# Altium PCB Motion_Detector_Light.PcbDoc
Units mm, origin at the board's own origin, x right, y up, seen from the top; angles counter-clockwise.
Board outline 75 x 30 mm, 4 copper layers (Top Layer, Layer 1, Layer 2, Bottom Layer), stack 1.548 mm thick; 23 components, 14 nets, 73 pads, 24 vias.
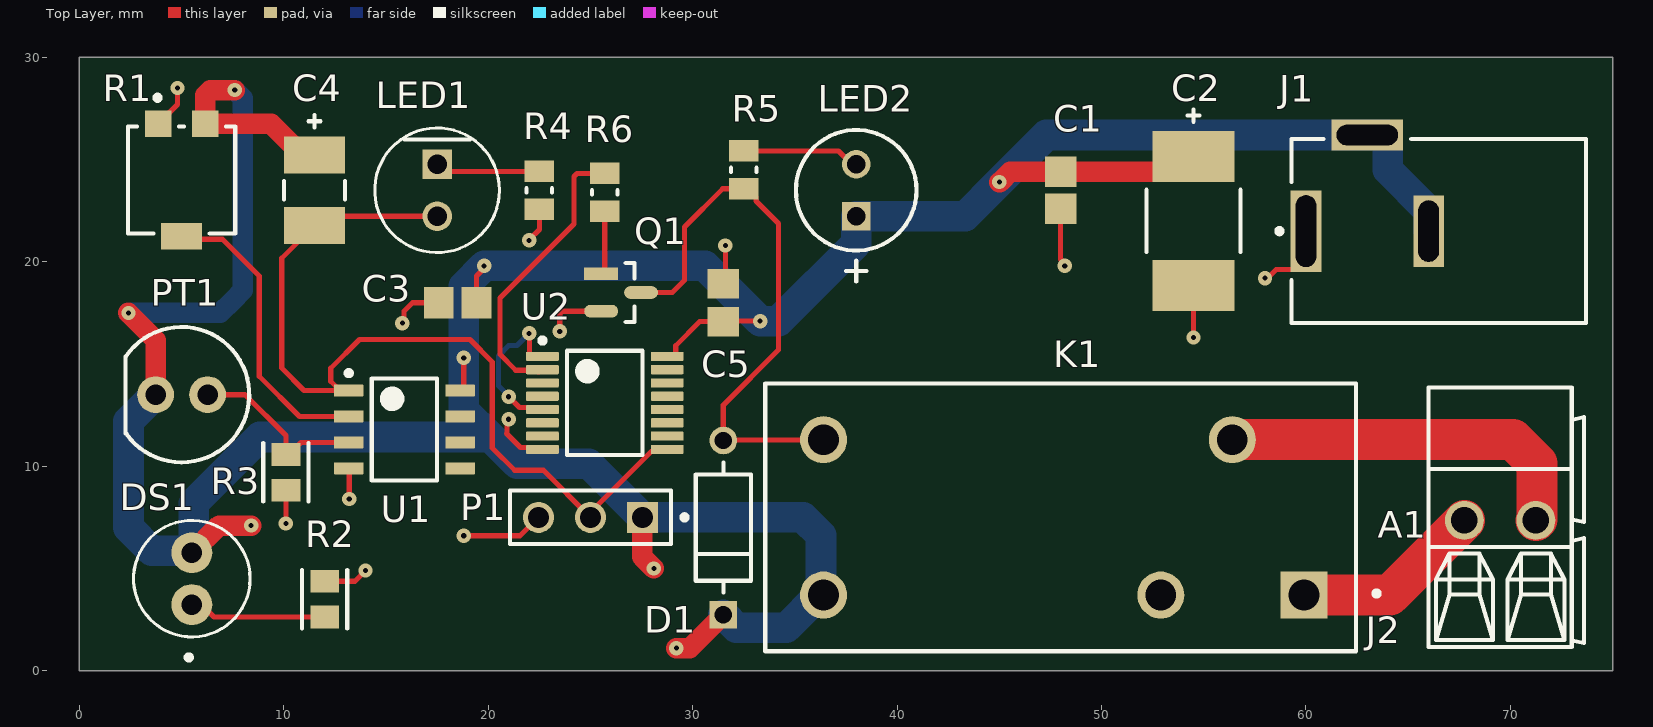
[diagram p0: Top Layer view]
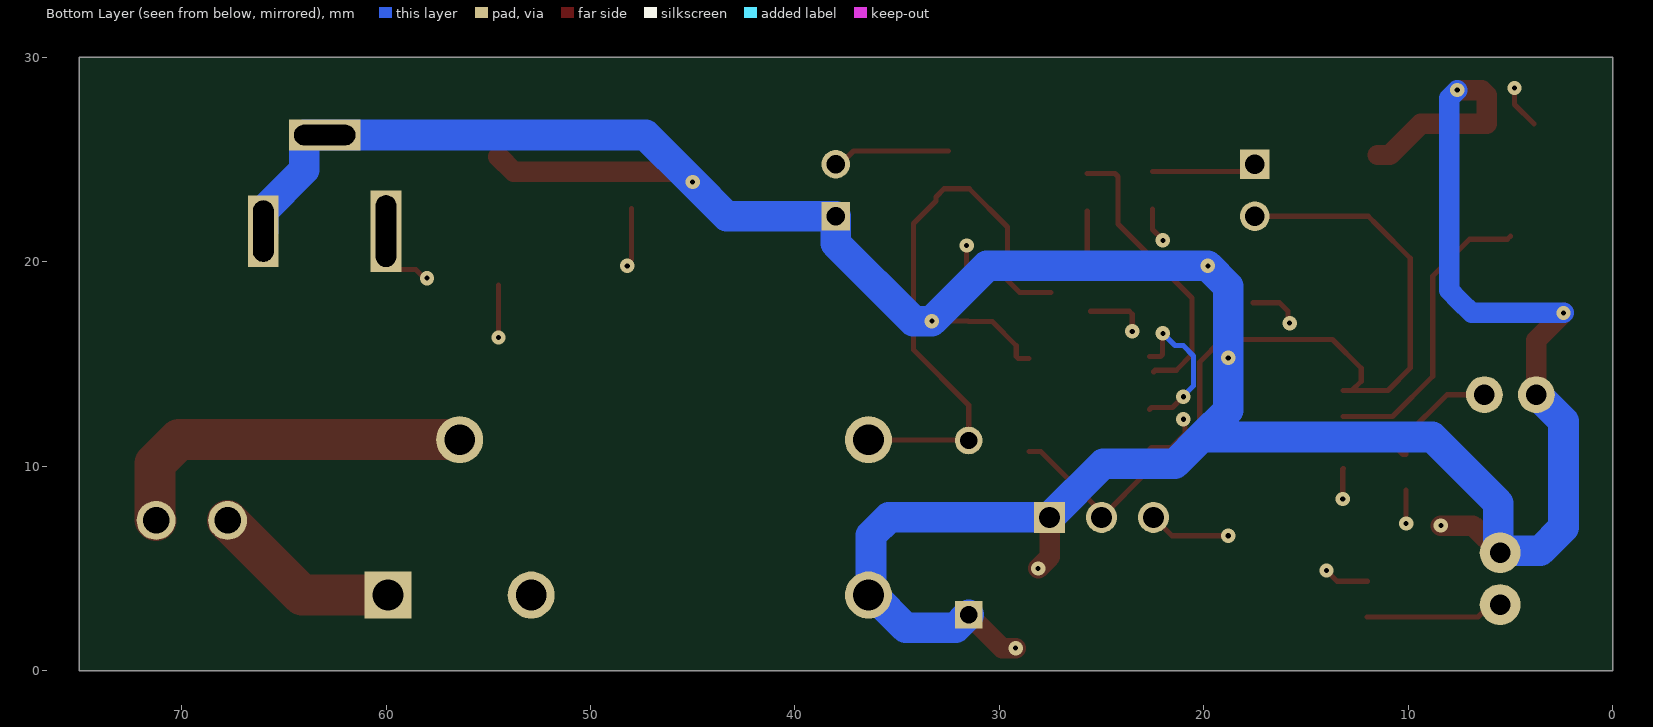
[diagram p1: Bottom Layer view, seen from below]
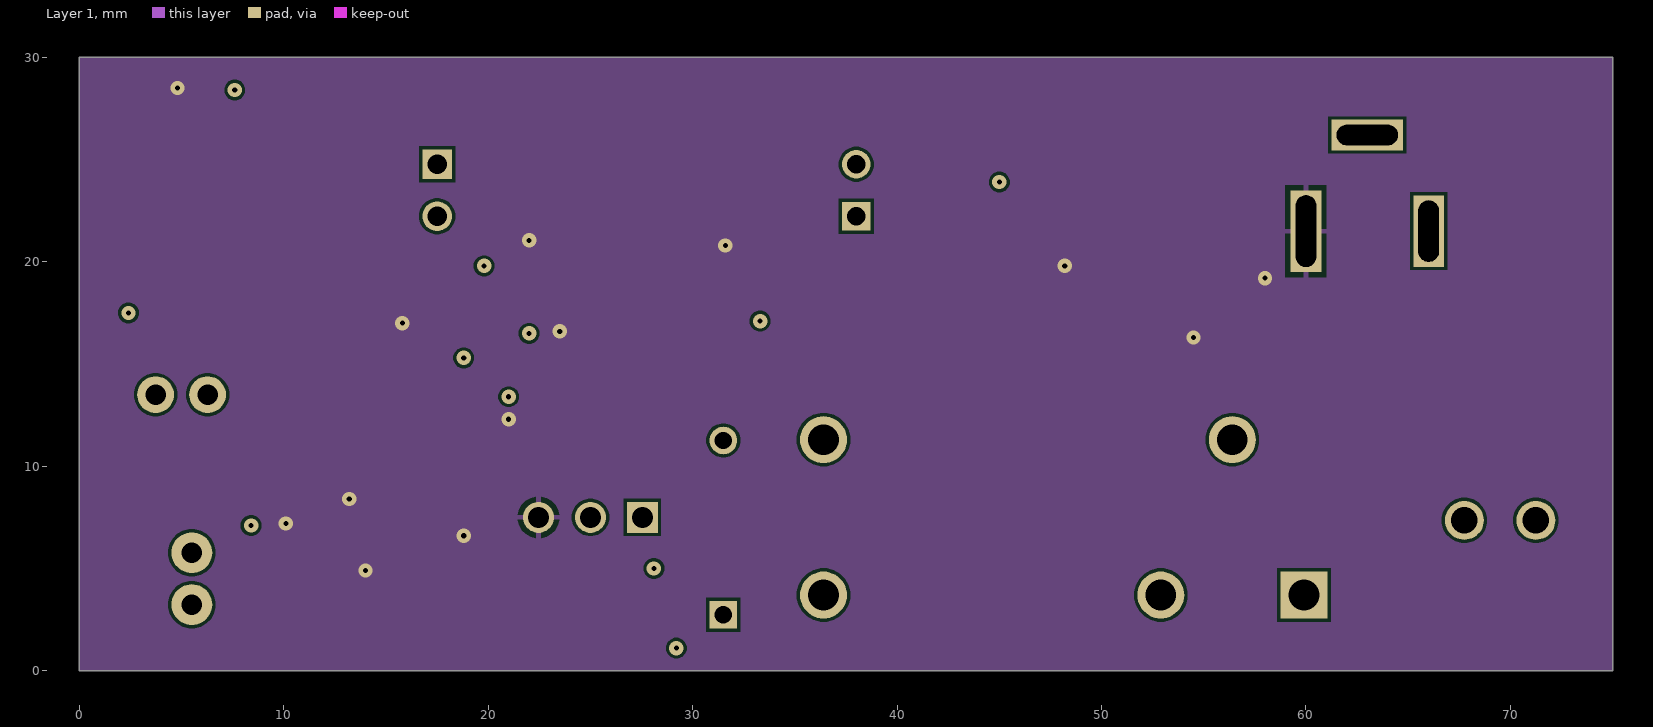
[diagram p2: Layer 1]
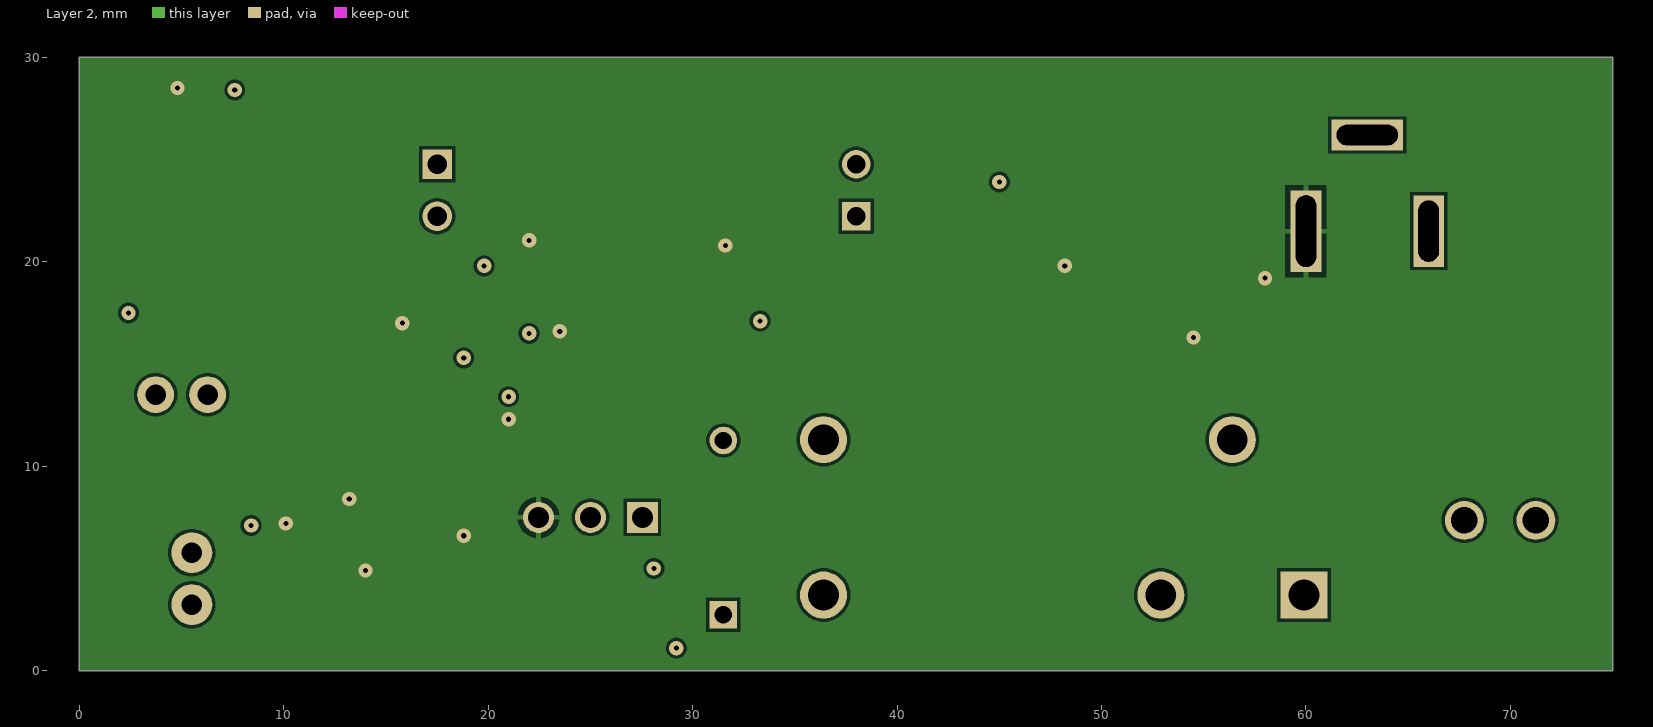
[diagram p3: Layer 2]
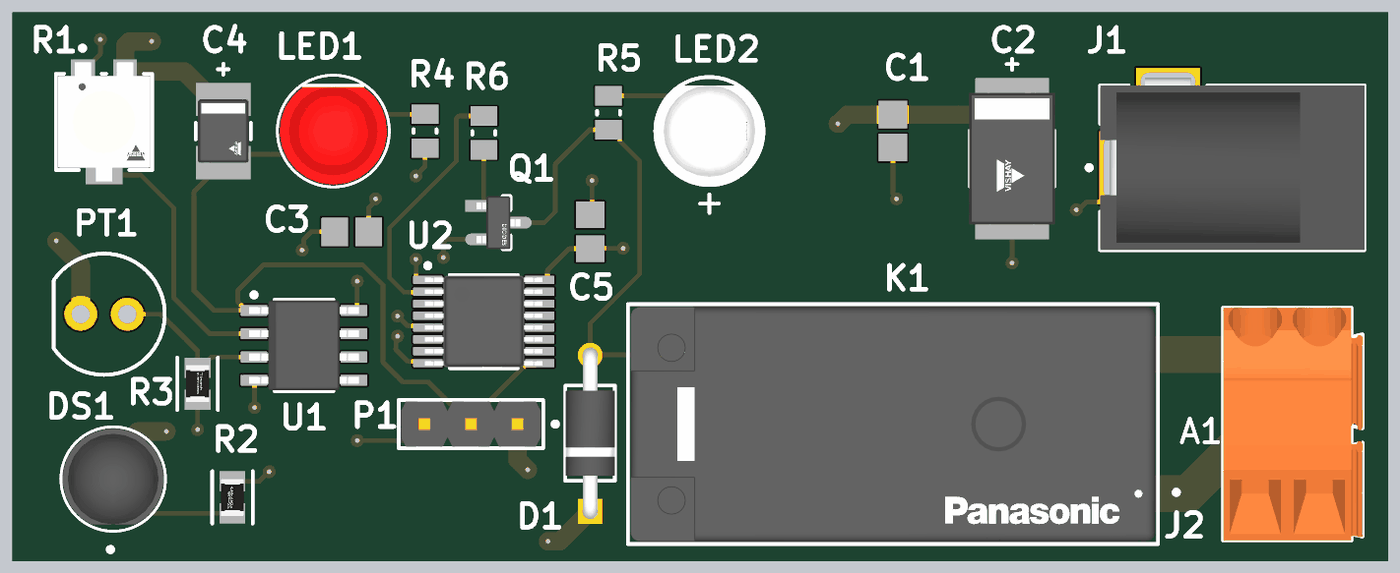
[diagram p4: 3D render of the assembled board from above, using the file's embedded part models]

## Layer stack, top to bottom
Top Solder: solder mask 0.0102, Solder Resist, Dk 3.5
Top Layer: signal copper 0.0356
Dielectric 2: prepreg 0.2083, PP-022, Dk 4.5
Layer 1: signal copper 0.035
Dielectric 1: core 0.9906, Core-042, Dk 4.6
Layer 2: signal copper 0.035
Dielectric 3: prepreg 0.2083, PP-022, Dk 4.5
Bottom Layer: signal copper 0.0356
Bottom Solder: solder mask 0.0102, Solder Resist, Dk 3.5

## Board outline
0,0 75,0 75,30 0,30

## Design rules (kind name [scope] priority, off if disabled: settings)
Clearance [All] p1: gap=0.15 ignorepadtopadclearanceinfootprint=FALSE
PolygonConnect [All] p1: thpad.connectstyle=Relief thpad.reliefconductorwidth=0.254 thpad.reliefentries=4 thpad.polygonreliefangle="90 Angle" thpad.airgapwidth=0.254 smdpad.connectstyle=Relief smdpad.reliefconductorwidth=0.254 smdpad.reliefentries=4 smdpad.polygonreliefangle="90 Angle" smdpad.airgapwidth=0.254 via.connectstyle=Direct via.reliefconductorwidth=0.254 via.reliefentries=4 via.polygonreliefangle="90 Angle" via.airgapwidth=0.254
RoutingVias [All] p1: holewidth=0.25 width=0.7 viastyle="Through Hole" minholewidth=0.25 minwidth=0.7 maxholewidth=0.25 maxwidth=0.7
SolderMaskExpansion [All] p1: expansion=0.102 istentingtop=FALSE
SupplyNets "Schematic Supply Nets_1" [InNet('GND')] p1: voltage=0.000
SupplyNets "Schematic Supply Nets" [InNet('5V')] p2: voltage=0.000
Width [All] p1: maxlimit=2 minlimit=0.15 preferedwidth=0.254
30 further rules are at their usual default settings.

## Classes and differential pairs
component class Motion_Control_Inputs: C1 C2 C3 C4 DS1 J1 LED1 P1 PT1 R1 R2 R3 R4 U1
component class Counter_Switch: C5 D1 J2 K1 LED2 Q1 R5 R6 U2

## Components (designator, comment, footprint, x,y, rotation, side; value= is the part's Value field where it differs from the comment)
C1 "1uF" CAPC2013X100X50ML20T25 48,23.5 r90 top
C2 "470uF" FP-TR3E-MFG 54.5,22 r90 top
C3 "0.1uF" CAPC2013X145X50ML20T20 18.5,18 r0 top
C4 "100uF" FP-TR3B-MFG 11.5,23.5 r90 top
C5 "0.1uF" CAPC2013X145X50ML20T20 31.5,18 r270 top
D1 "1N4007E-E3/54" FP-1N4007E-E3-54-MFG 31.5,7 r90 top
DS1 "IR" FP-SFH_4554-MFG 5.5,4.5 r90 top
J1 "PJ-002A" CUI-PJ-002A_V 63,21.5 r0 top
J2 "1714980000" LM_3_5_135_02 69.5,7.5 r0 top
K1 "JW1FSN-B-DC5V" FP-JW1FSN-B-DC5V-MFG 48,7.5 r0 top
LED1 "RED" FP-HLMP-4700-MFG 17.5,23.5 r270 top
LED2 "Green" KING-WP7113SGD_V 38,23.5 r90 top
P1 "MTLW-103-07-G-S-230" FP-MTLW-103-07-G-S-230-MFG 25,7.5 r180 top
PT1 "NPN" PhotoTr_PT334-6C 5,13.5 r180 top
Q1 "2N7002-7-F" FP-SOT23-IPC_A 26.5,18.5 r0 top
R1 "10K" FP-TS53YL-MFG 5,24 r180 top
R2 "10K" FP-RP73P-2A-IPC_B 12,3.5 r90 top value=10KΩ
R3 "10K" FP-RP73P-2A-IPC_B 10.1,9.7 r270 top value=10KΩ
R4 "220" RESC2013X60X30NL20T20 22.5,23.5 r270 top
R5 "220" RESC2013X60X30NL20T20 32.5,24.5 r90 top
R6 "220" RESC2013X60X30NL20T20 25.7,23.4 r270 top
U1 "OPA2343UA" D0008A_N 15.9,11.8 r0 top
U2 "CD40174BPW" PW0016A_M 25.7,13.1 r0 top

## Footprints (in the part's own frame and the unit in brackets; to place one, negate y for a bottom-side part, rotate by r counter-clockwise, add the part's x,y. Pads: shape width x height; smd on the part's side, far side on the other; paste and mask are expansions set on the pad)
CAPC2013X100X50ML20T25 [mm] "Chip Capacitor, 2-Leads, Body 2.00x1.25mm, IPC Low Density"
  rect 1.5x1.55 smd: 1(-0.9,0) 2(0.9,0)
  body extent -1.1,-0.72 1.1,0.72, height 1
CAPC2013X145X50ML20T20 [mm] "Chip Capacitor, 2-Leads, Body 2.00x1.25mm, IPC Low Density"
  rect 1.45x1.55 smd: 1(-0.925,0) 2(0.925,0)
  body extent -1.1,-0.72 1.1,0.72, height 1.45
CUI-PJ-002A_V [mm] "THD, 3-Leads, Body 14.4x9mm, Height 11mm"
  rect 1.5x4 hole 1 slot 3.5 at 90 deg: 1(-3,0)
  rect 1.5x3.5 hole 1 slot 3 at 90 deg: 2(3,0)
  rect 3.5x1.5 hole 1 slot 3 at 0 deg: 3(0,4.7)
  silkscreen extent -4.42,-4.5 10.7,4.5, body extent -3.7,-4.5 10.7,4.9, height 11
D0008A_N [mm] "SOIC, 8-Leads, Body 5x4mm, Pitch 1.27mm, IPC Medium Density"
  rrect17% 1.45x0.6 smd: 1(-2.725,1.905) 2(-2.725,0.635) 3(-2.725,-0.635) 4(-2.725,-1.905) 5(2.725,-1.905) 6(2.725,-0.635) 7(2.725,0.635) 8(2.725,1.905)
  silkscreen extent -2.85,-2.5 1.6,2.88, body extent -3,-2.45 3,2.45, height 1.63
FP-1N4007E-E3-54-MFG [mm]
  rect 1.35x1.35 hole 0.85 paste-2539.97 mask+0: 1(-4.26,0)
  round 1.35 hole 0.85 paste-2539.97 mask+0: 2(4.26,0)
  silkscreen extent -3.18,-1.35 3.18,1.35, body extent -5.03,-1.45 5.03,1.45, height 0.25
FP-HLMP-4700-MFG [mm]
  rect 1.45x1.45 hole 0.95 paste-2539.97 mask+0: 1(-1.27,0)
  round 1.45 hole 0.95 paste-2539.97 mask+0: 2(1.27,0)
  silkscreen extent -3.05,-3.05 3.05,3.05, body extent -3.15,-3.15 3.15,3.15, height 0.25
FP-JW1FSN-B-DC5V-MFG [mm]
  rect 2.3x2.3 hole 1.5 paste-2539.97 mask+0: 1(11.9,-3.8)
  round 2.3 hole 1.5 paste-2539.97 mask+0: 2(4.9,-3.8) 3(-11.6,-3.8) 4(8.4,3.8) 5(-11.6,3.8)
  silkscreen extent -14.45,-6.55 15.58,6.55, body extent -14.55,-6.65 14.55,6.65, height 0.25
FP-MTLW-103-07-G-S-230-MFG [mm]
  rect 1.52x1.52 hole 1.02 paste-2539.97 mask+0: 1(-2.54,0)
  round 1.52 hole 1.02 paste-2539.97 mask+0: 2(0,0) 3(2.54,0)
  silkscreen extent -4.73,-1.31 3.94,1.31, body extent -4.04,-1.41 4.04,1.41, height 0.25
FP-RP73P-2A-IPC_B [mm]
  rect 1.106x1.408 smd paste+0 mask+0: 1(-0.876,0) 2(0.876,0)
  silkscreen extent -1.43,-1.1 1.43,1.1, body extent -1.68,-0.95 1.68,0.95, height 0.25
FP-SFH_4554-MFG [mm]
  round 2 hole 1 paste-2539.97 mask+0: 1(-1.27,0) 2(1.27,0)
  silkscreen extent -3.97,-2.85 2.85,2.85, body extent -2.95,-2.95 2.95,2.95, height 0.25
FP-SOT23-IPC_A [mm]
  rect 1.659x0.627 smd paste+0 mask+0: 1(-0.977,0.915)
  rrect100% 1.659x0.627 smd paste+0 mask+0: 2(-0.977,-0.915) 3(0.977,0)
  silkscreen extent 0.23,-1.45 0.65,1.45, body extent -2.31,-1.95 2.31,1.95, height 0.25
FP-TR3B-MFG [mm]
  rect 1.8x3 smd paste+0 mask+0: 1(-1.725,0) 2(1.725,0)
  silkscreen extent -0.45,-1.5 3.67,1.5, body extent -2.73,-1.6 2.73,1.6, height 0.25
FP-TR3E-MFG [mm]
  rect 2.5x4 smd paste+0 mask+0: 1(-3.15,0) 2(3.15,0)
  silkscreen extent -1.53,-2.3 5.45,2.3, body extent -4.5,-2.4 4.5,2.4, height 0.25
FP-TS53YL-MFG [mm]
  rect 1.3x1.3 smd paste+0 mask+0: 1(1.15,-2.75) 3(-1.15,-2.75)
  rect 2x1.3 smd paste+0 mask+0: 2(0,2.75)
  silkscreen extent -2.63,-4.15 2.63,2.63, body extent -2.73,-3.5 2.73,3.5, height 0.25
KING-WP7113SGD_V [mm] "THD, 2-Leads, Dia 5.9mm, Body Length 8.6mm"
  rect 1.4x1.4 hole 0.889: 1(-1.27,0)
  round 1.4 hole 0.889: 2(1.27,0)
  silkscreen extent -4.47,-2.95 2.95,2.95, body extent -2.95,-2.95 2.5,2.95, height 15.5
LM_3_5_135_02 [mm] "OMNIMATE Signal - Serie LM  LM 3.50/02/135 3.2"
  round 1.9 hole 1.3: A1(-1.75,-0.15) A2(1.75,-0.15)
  silkscreen extent -3.5,-6.35 4.1,6.35, body extent -3.5,-6.35 4.1,6.35, height 12.71
PhotoTr_PT334-6C [mm]
  round 1.8 hole 1: 1(-1.27,0) 2(1.27,0)
  silkscreen extent -3.31,-3.31 2.74,3.31, body extent -3.1,-3.11 2.54,3.11, height 11.9
PW0016A_M [mm] "SOP, 16-Leads, Body 5.1x4.5mm, Pitch 0.65mm, IPC Low Density"
  rrect22% 1.6x0.45 smd: 1(-3.05,2.275) 2(-3.05,1.625) 3(-3.05,0.975) 4(-3.05,0.325) 5(-3.05,-0.325) 6(-3.05,-0.975) 7(-3.05,-1.625) 8(-3.05,-2.275) 9(3.05,-2.275) 10(3.05,-1.625) 11(3.05,-0.975) 12(3.05,-0.325) 13(3.05,0.325) 14(3.05,0.975) 15(3.05,1.625) 16(3.05,2.275)
  silkscreen extent -3.17,-2.55 1.85,3.17, body extent -3.21,-2.5 3.21,2.5, height 1
RESC2013X60X30NL20T20 [mm] "Chip Resistor, 2-Leads, Body 2.00x1.25mm, IPC Medium Density"
  rect 1.05x1.45 smd: 1(-0.925,0) 2(0.925,0)
  silkscreen extent -0.1,-0.63 0.1,0.63, body extent -1.1,-0.72 1.1,0.72, height 0.6

## Part data
C1: library part "CAP 1uF 10V 0805", Manufacturer=Kemet, Part Number=C0805X105K8RACTU
C2: library part "CAP Pol 470uF 10V SMD", "TR3E477K010C0100 Cap Tant Solid 470uF 10V E CASE 10% (7.3 X 4.3 X 4mm) Inward L SMD 7343-43 0.1 Ohm 125C T/R", Capacitance=470µF, Case Code (Imperial)=2917, Case Code (Metric)=7343, Case/Package=Molded, Dielectric Material=Tantalum, ESR (Equivalent Series Resistance)=100mΩ, Leakage Current=47µA, Max Operating Temperature=125°C, Min Operating Temperature=-55°C, Ripple Current=1.28A, Tolerance=10%, Voltage=10V, Depth=4.3mm, Dissipation Factor=15%, Height=4mm, Length=7.3mm, Mount="Surface Mount", NexarPartId=11565183, Number of Pins=2, Packaging="Cut Tape", Polarity=Polar, Radiation Hardening=No, REACH SVHC=Unknown, RoHS=Compliant, Schedule B="8532210050, 8532210050|8532210050|8532210050|8532210050|8532210050", Termination=SMD/SMT, Voltage Rating=10V, Voltage Rating (DC)=10V, Width=4.3mm
C3 C5: library part "CAP 0.1uF 10V 0805", Manufacturer=Vitramon, Part Number=VJ0805Y104MXQCW1BC
C4: library part "CAP Pol 100uF 10V SMT", "TR3B107M010C1400 Cap Tant Solid 100uF 10V B CASE 20% (3.5 X 2.8 X 1.9mm) Inward L SMD 3528-21 1.4 Ohm 125C T/R", Capacitance=100µF, Case Code (Imperial)=1411, Case Code (Metric)=3528, ESR (Equivalent Series Resistance)=1.4Ω, Leakage Current=10µA, Max Operating Temperature=125°C, Min Operating Temperature=-55°C, Ripple Current=250mA, Tolerance=20%, Voltage Rating=10V, Case/Package=1411, Depth=2.8mm, Dissipation Factor=25%, Features="General Purpose", Height=2.1mm, Height - Seated (Max)=2.1082mm, Lead Free="Lead Free", Length=3.5mm, Mount="Surface Mount", NexarPartId=44433230, Number of Pins=2, Packaging="Cut Tape", Polarity=Polar, REACH SVHC=Unknown, RoHS=Compliant, Schedule B="8532210050, 8532210050|8532210050, 8532210050|8532210050|8532210050, 8532210050|8532210050|8532210050|8532210050", Termination=SMD/SMT, Voltage Rating (DC)=10V, Width=2.794mm
D1: library part "Diode General Purpose 1N4007", "DIODE GEN PURP 1KV 1A DO204AL", Average Rectified Current=1A, Case/Package=DO-41, Forward Voltage=1.1V, Max Operating Temperature=150°C, Max Repetitive Reverse Voltage (Vrrm)=1kV, Max Reverse Current=5uA, Max Surge Current=45A, Min Operating Temperature=-50°C, Package Quantity=5500, Contact Plating=Tin, Element Configuration=Single, Max Reverse Voltage (DC)=1kV, Mount="Through Hole", Number of Pins=2, Packaging="Tape and Reel", Peak Non-Repetitive Surge Current=45A, Radiation Hardening=No, Reverse Voltage=1kV, RoHS Compliant=Yes, Series=-
DS1: library part "IR Emitter 5mm", "EMITTER IR 850NM", Colour=Infrared, Forward Current=100mA, Forward Voltage=1.7V, Manufacturer="Osram Opto", Manufacturer Part Number="SFH 4554", Package=SFH_4554, Power Dissipation=200mW, Reverse Voltage=5V, Temperature="-40°C to +100°C", Temperature Range High=+100°C, Temperature Range Low=-40°C, Automotive=No, Category=Diode, ComponentLink2Description=Datasheet, ComponentLink2URL=https://forum.upverter.com/uploads/short-url/9WLvpCRBrQtL1CWwnUt39ojzKI8.pdf, Device Class L1=Optoelectronics, Device Class L2=LEDs, Device Class L3=unset, Digikey Description="EMITTER IR 850NM", Lead Free=Yes, Led Orientation=Straight, Mouser Description="Infrared Emitter 850nm 550mW/sr Circular Top Mount 2-Pin T-1 3/4", Octopart=https://octopart.com/sfh+4554-osram+opto-55819455, Peak Emmision Wavelength=860nm, RoHS=TRUE, Viewing Angle=20°
J1: library part "Connector DC Power Jack 2mm", "Through Hole Right Angle DC Power Jack, 2.5 A, 2 mm Center Pin, 3 Position, -25 to 85 degC, RoHS, Bulk", Current Rating=2.5A, Flammability Rating=UL94V-0, Insulation Resistance=50MOhms, Manufacturer=CUIInc., Operating Temperature Range=-25Cto+85C, Package Description="3-Pin Through Hole Device, Body 14.4 x 9 mm, Height 11 mm", Voltage Rating=24V, Brand=CUI, Connector Type=DCPowerJack, Contact Gender=Male, Contact Material=Copper, Contact Plating=Nickel, Datasheet URL=http://www.cui.com/product/resource/pj-002a.pdf, Datasheet Version="Rev. 1.03, 04/2016", Factory Pack Quantity=500, Housing Material=PolybutyleneTerephthalate(PBT), Inside Contact Diameter=2mm, Manufacturer URL=http://www.cui.com/, Mounting Angle=Right, Mounting Style=ThroughHole, Mounting Technology=ThroughHole, Outside Contact Diameter=6.5mm, Package Reference=PJ-002A, Product=Jacks, Product Category=DCPowerConnectors, RoHS=True, Termination Style=ThroughHole
J2: library part "Terminal Block 2Pos", "OMNIMATE Signal - series LM", Colour=Orange, Manufacturer=Weidmueller, Rated_current_use_group_B_UL_1059="10 A", Rated_voltage_for_surge_voltage_class_pollution_degree_II_2="320 V", Rated_voltage_use_group_B_UL_1059="300 V", UL_94_flammability_rating=V-2, ComponentLink1Description="Manufacturer URL", ComponentLink1URL=http://www.weidmueller.com/, ComponentLink2Description="URL Link1", ComponentLink2URL=http://catalog.weidmueller.com/catalog/Start.do?localeId=en&ObjectID=1714980000, Contact_material=Cu-Leg, Contact_surface=tinned, Insulating_material=PA, Mounting_onto_the_PCB="Solder connection", No_of_poles=2, PackageReference=LM_3_5_135_02, Packaging=Box, PartNumber=1714980000, Pitch_inch="0,138 inch", Pitch_mm="3,5 mm", Qty="100 PCS", Revision=V1, Short_text_for_material="LM 3.50/02/135 3.2SN OR BX", Side_termination_characteristic="closed side", Solder_pin_length_mm="3,2 mm", Solid_max_H05_07_V_U="1,5 mm²", Solid_min_H05_07_V_U="0,5 mm²", Wire_cross_section_AWG_max_UL_1059="AWG 14", Wire_cross_section_AWG_min_UL_1059="AWG 28"
K1: library part "RELAY SPDT 5V", "RELAY GEN PURPOSE SPDT 10A 5V", Coil Current=106mA, Coil Power=530mW, Coil Resistance=47R, Coil Voltage (DC)=5V, Contact Current Rating=10A, Max Operating Temperature=85°C, Max Voltage Rating (AC)=250V, Max Voltage Rating (DC)=30V, Min Operating Temperature=-40°C, Package Quantity=100, Ratings=IP67, Switching Capacity=300W, Test Voltage=5kV, Coil Type=Non-Latching, Contact Material=Silver, Depth=12.8mm, Lead Free="Lead Free", Length=28.6mm, Max Current Rating=10A, Mount="Through Hole", Number of Pins=5, Operate Time=15ms, Packaging=Bulk, Power Consumption=530mW, Radiation Hardening=No, Relay Type="General Purpose", Release Time=5ms, RoHS Compliant=Yes, Series=JW, Switching Current=10A, Termination="PC Pin", Throw Configuration=SPDT, Voltage Rating (AC)=250V, Voltage Rating (DC)=30V
LED1: library part "LED 5mm Red", "LED RED DIFFUSED T-1 3/4 T/H", Colour=Red, Forward Current=2mA, Forward Voltage=1.7V, Manufacturer=Broadcom, Manufacturer Part Number=HLMP-4700, Power Dissipation=14mW, Reverse Voltage=5V, Temperature="-40°C to +100°C", Temperature Range High=+100°C, Temperature Range Low=-40°C, Automotive=No, Category=Diode, ComponentLink2Description=Datasheet, ComponentLink2URL=https://docs.broadcom.com/docs/AV02-1557EN, Device Class L1=Optoelectronics, Device Class L2=LEDs, Device Class L3=unset, Digikey Description="LED RED DIFFUSED T-1 3/4 T/H", Lead Free=Yes, Led Orientation=Straight, Luminous Intensity=2.3mcd, Mouser Description="LED; Red; 2.3mcd; 0.24In.Dia.; T-1-3/4; 500mA; 1.7V; 635nm; 50deg; 5V; 24mW; -55degC;", Octopart=https://octopart.com/hlmp-4700-broadcom-71130526, Package=HLMP-4700, Peak Emmision Wavelength=635nm, RoHS=TRUE, Viewing Angle=50°, Wavelength=626nm
LED2: library part "LED 5mm Green", "LED Green, 62.5 mW, 25 mA, -40 to 85 degC, 2-Pin THD, RoHS, Bulk", Case/Package=Radial, Forward Voltage=2.2V, Manufacturer=Kingbright, Package Description="2-Pin Through Hole Device, Dia 5.9 mm, Body Length 8.6 mm", Package Quantity=1000, Package Reference=WP7113SGD, Test Current=20mA, Colour=Green, Datasheet URL=http://www.kingbrightusa.com/images/catalog/SPEC/WP7113SGD.pdf, Datasheet Version="Rev. 6B, 01/2015", Dominant Wavelength=568nm, Height=8.6mm, Illumination Colour=Green, Lead Free=LeadFree, Lens Style=Tinted, Luminous Intensity=40mcd, Packaging=Bulk, RoHSCompliant=true, Viewing Angle=30degrees, Wavelength=568nm
P1: library part "Header 3POS 2.54mm TH Single Row", "CONN HEADER VERT 3POS 2.54MM", Housing Color=Black, Max Current Rating=3A, Max Operating Temperature=125°C, Min Operating Temperature=-55°C, Contact Material=Bronze, Contact Plating=Gold, Depth=2.48mm, Gender=Male, Housing Material=Polymer, Length=7.62mm, Number of Contacts=3, Number of Rows=1, Orientation=Straight, Packaging=Bulk, Pitch=2.54mm, Radiation Hardening=No, RoHS Compliant=Yes, Termination=Solder
PT1: library part "Phototransistor 5mm", "Phototransistor Chip Silicon 940nm 2-Pin T-1 Bag / 5mm Phototransistor, T-1 3/4", Manufacturer=Everlight, Manufacturer Part Number=PT334-6B
Q1: library part "MOSFET 2N7002 SMD", "MOSFET N-CH 60V 115MA SOT23-3", Case/Package=SOT-23, Continuous Drain Current (ID)=115mA, Drain to Source Breakdown Voltage=70V, Drain to Source Resistance=7.5R, Drain to Source Voltage (Vdss)=60V, Gate to Source Voltage (Vgs)=20V, Input Capacitance=50pF, Max Operating Temperature=150°C, Max Power Dissipation=300mW, Min Operating Temperature=-55°C, Package Quantity=3000, Power Dissipation=540mW, Threshold Voltage=2.5V, Contact Plating=Tin, Current Rating=115mA, Dual Supply Voltage=60V, Element Configuration=Single, Fall Time=5.6ns, Height=1mm, Lead Free="Lead Free", Length=2.9mm, Mount="Surface Mount", Nominal Vgs=2.5V, Number of Channels=1, Number of Elements=1, Number of Pins=3, On-State Resistance=7.5R, Packaging="Tape and Reel", Radiation Hardening=No, Rds On Max=7.5R, REACH SVHC="No SVHC", Rise Time=3ns, Termination=SMD/SMT, Turn-Off Delay Time=11ns, Turn-On Delay Time=7ns, Voltage=60V, Voltage Rating (DC)=60V, Weight=0.000282oz, Width=1.3mm
R1: library part "Res 10K Trimmer", "TRIMMER 10K OHM 0.25W GW TOP ADJ", Max Operating Temperature=125°C, Max Power Dissipation=250mW, Min Operating Temperature=-55°C, Package Quantity=1, Resistance=10kR, Resistance Tolerance=20%, Resistor Type=Cermet, Temperature Coefficient=100ppm/°C, Depth=6.4mm, Height=2.7mm, Lead Free="Lead Free", Length=5mm, Military Standard=Not, Mount="Surface Mount", Number of Turns=1, Packaging="Tape and Reel", Power Rating=250mW, Radiation Hardening=No, RoHS Compliant=Yes, Series=TS53Y, Taper=Linear, Technology=CERMET, Termination="Gull Wing", Tolerance=20%, Width=5mm
R2 R3: library part "Res 10K 0.25W SMD", "RP73P 0805 10KΩ 0.25W 25ppm/°C 0.10% 150V", Manufacturer="TE Connectivity", Manufacturer Part Number=RP73PF2A10KBTDF, Package=RP73P-2A, Power Rating=0.25W, Resistance=10KΩ, Temperature="-55°C to +155°C", Temperature Coefficient=25ppm/°C, Temperature Range High=+155°C, Temperature Range Low=-55°C, Tolerance=0.001, Voltage Rating=150V, Automotive=No, Category=Res, ComponentLink2Description=Datasheet, ComponentLink2URL=https://www.te.com/commerce/DocumentDelivery/DDEController?Action=srchrtrv&DocNm=1773272&DocType=DS&DocLang=English, Composition="Thin Film", Device Class L1="Passive Components", Device Class L2=Resistors, Device Class L3="Chip SMD Resistors", Height=0.65mm, Ipc Land Pattern Name=RESC200125X55, Lead Free=Yes, Octopart=https://octopart.com/2176093-5-te+connectivity-46441071, RoHS=TRUE, Series=RP73P
R4 R5 R6: library part "Res 220 Ohm 0.25W SMD", Manufacturer="KOA Speer", Part Number=SG73S2ATTD2200F
U1: library part "IC OpAmp General Purpose Dual Circuit", "Single-Supply, Rail-to-Rail Operational Amplifier MicroAmplifier(TM) Series, 2.7 to 5.5 V, -40 to 85 degC, 8-pin SOIC (D8), Green (RoHS & no Sb/Br)", Manufacturer="Texas Instruments", Rating=Catalog, Total Supply Voltage(Max)(+5V is 5, +/-5V is 10)=5.5, Total Supply Voltage(Min)(+5V is 5, +/-5V is 10)=2.7, CMRR(Min)(dB)=74, Code_JEDEC=MS-012, ComponentLink1Description="Manufacturer URL", ComponentLink1URL=http://www.ti.com/, ComponentLink2Description=Datasheet, ComponentLink2URL=http://www.ti.com/lit/ds/symlink/opa2343.pdf, ComponentLink3Description="Package Specification", ComponentLink3URL=http://www.ti.com/litv/pdf/msoi002j, DatasheetVersion=SBOS090A, Eco-Plan="Green (RoHS & no Sb/Br)", GBW(Typ)(MHz)=5.5, IIB(Max)(pA)=10, Iq per channel(Max)(mA)=1.25, Mounting Technology="Surface Mount", Number of Channels=2, Offset Drift(Typ)(uV/C)=3, PackageDescription="8-Pin Plastic Small Outline, Body 4.9 x 3.9 mm, Pitch 1.27 mm", PackageReference=D0008A, PackageVersion="4040047-3/M, 06/2011", Packing=TUBE, PartNumber=OPA2343UA, Slew Rate(Typ)(V/us)=6, Sub Family="High Output Current Amplifier (>=50mA), Low Input Bias Current Amp (<=10pA), Low Supply Voltage Amplifier (<=2.7V), Precision Amplifier", Vio (25C)(Max)(mV)=8
U2: library part "IC CD4071", "CMOS Hex D-Type Flip-Flop, PW0016A, TUBE", F @ Nom Voltage(Max)(Mhz)=8, Generic Part Number=CD40174B, ICC @ Nom Voltage(Max)(mA)=0.06, Manufacturer="Texas Instruments", Operating Temperature Range(C)="-55 to 125", Rating=Catalog, tpd @ Nom Voltage(Max)(ns)=140, Voltage(Nom)(V)=10, 3-State Output=No, Bits(#)=6, Code_JEDEC=MO-153, DatasheetVersion=SCHS104C, Input Type=CMOS, Output Drive (IOL/IOH)(Max)(mA)=1.5/-1.5, Output Logic=Non-inverted, Output Type=CMOS, PackageReference=PW0016A, Schmitt Trigger=No, Technology Family=CD4000, VCC(Max)(V)=18, VCC(Min)(V)=3

## Via types
v1: diameter 0.7, hole 0.25, Top Layer to Bottom Layer, tented both sides, 24 vias

## Nets (pads, with @x,y where several pads share a name; then routed paths per layer and width w, separated by ;. In a path a pad name is that pad's centre, name@x,y a point inside that pad or via, vN(x,y) a via of type N, cw(c..) or ccw(c..) an arc to the next point about the centre after c; other vN are vias at no path point)
5V: C1.2 C2.2 C3.2 C4.2 C5.2 D1.1 DS1.2 J1.2 J1.3 K1.3 LED2.1 P1.1 PT1.2 R1.3 U1.8 U2.16 | length 178.8
  Top Layer w0.254: U1.8 U1.8 18.8,13.878 v1(18.8,15.3) ; C3.2 19.425,19.304 19.8,19.679 v1(19.8,19.8) ; U2.16@28.55,15.275 29.076,15.275 29.174,15.373 29.174,15.899 30.35,17.075 C5.2 31.525,17.1 v1(33.3,17.1)
  Top Layer w1: v1(2.4,17.5) 3.73,16.17 PT1.2 ; DS1.2 6.83,7.1 v1(8.4,7.1) ; v1(7.6,28.4) 6.4,28.4 6.15,28.15 R1.3 9.375,26.75 10.9,25.225 C4.2 ; P1.1 27.54,5.56 v1(28.1,5) ; v1(29.2,1.1) 29.86,1.1 D1.1 ; v1(45,23.9) 45.034,23.9 45.534,24.4 C1.2 53.75,24.4 C2.2
  Bottom Layer w1: v1(2.4,17.5) 6.9,17.5 7.5,18.1 8,18.6 8,28 v1(7.6,28.4)
  Bottom Layer w1.5: PT1.2 3.7,13.5 2.4,12.2 2.4,7 3.534,5.866 5.404,5.866 DS1.2 5.596,5.866 5.596,8.196 8.827,11.427 20.106,11.427 ; D1.1 32.14,2.1 34.584,2.1 36.184,3.7 K1.3 36.279,3.821 36.279,6.621 35.4,7.5 P1.1 24.919,10.121 21.411,10.121 20.106,11.427 ; J1.2 66,22.5 64,24.5 64,26.2 J1.3 47.3,26.2 v1(45,23.9) 43.33,22.23 LED2.1 38,20.9 34.2,17.1 v1(33.3,17.1) 30.6,19.8 v1(19.8,19.8) 18.8,18.8 v1(18.8,15.3) 18.8,12.732 20.106,11.427
GND: C1.1 C2.1 C3.1 C5.1 J1.1 P1.3 Q1.2 R1.1 R2.2 R3.2 R4.2 U1.4 U2.8 | length 32.5
  Top Layer w0.254: R1.1 4.8,27.7 v1(4.8,28.5) ; v1(10.1,7.2) R3.2 ; R2.2 13.476,4.376 v1(14,4.9) ; U1.4 13.2,9.87 v1(13.2,8.4) ; v1(15.8,17) 15.885,17.085 15.885,17.585 16.3,18 C3.1 ; v1(18.8,6.6) 21.56,6.6 P1.3 ; v1(21,12.3) 20.915,12.215 20.915,11.615 20.9,11.6 21.577,10.923 22.552,10.923 U2.8 ; v1(22,21.05) 22,21.084 22.5,21.584 R4.2 ; v1(23.5,16.6) 23.5,17.436 23.649,17.585 Q1.2 ; C5.1 31.6,19.025 v1(31.6,20.8) ; C1.1 48,20.121 48.2,19.921 v1(48.2,19.8) ; v1(54.5,16.3) C2.1 ; v1(58,19.2) 58.121,19.2 58.548,19.627 59.377,19.627 60,20.25 J1.1
NetD1_2: D1.2 K1.5 Q1.3 R5.1 | length 27.8
  Top Layer w0.254: Q1.3 29,18.5 29.6,19.1 29.6,21.7 31.475,23.575 R5.1 32.7,23.575 33.098,23.177 33.098,22.977 34.2,21.875 34.2,15.7 31.5,13 D1.2 31.52,11.28 36.38,11.28 K1.5
NetDS1_1: DS1.1 R2.1 | length 6.8
  Top Layer w0.254: DS1.1 5.972,3.23 6.579,2.624 R2.1
NetJ2_A1: J2.A1 K1.1 | length 9.4
  Top Layer w2: K1.1 64.1,3.7 J2.A1
NetJ2_A2: J2.A2 K1.4 | length 18.2
  Top Layer w2: K1.4 70.128,11.3 71.3,10.128 71.3,7.4 J2.A2
NetLED1_1: LED1.1 R4.1 | length 5.1
  Top Layer w0.254: LED1.1 17.845,24.425 R4.1
NetLED2_2: LED2.2 R5.2 | length 5.8
  Top Layer w0.254: R5.2 37.126,25.425 37.781,24.77 LED2.2
NetPT1_1: PT1.1 R3.1 U1.3 | length 8.9
  Top Layer w0.254: PT1.1 8.1,13.5 10.1,11.5 R3.1 10.251,10.576 10.84,11.165 U1.3
NetQ1_1: Q1.1 R6.2 | length 3.1
  Top Layer w0.254: Q1.1 25.7,19.592 R6.2
NetR1_2: R1.2 U1.2 | length 14.7
  Top Layer w0.254: R1.2 5.15,21.1 7,21.1 8.8,19.3 8.8,14.4 10.765,12.435 U1.2
NetR6_1: R6.1 U2.2 | length 14
  Top Layer w0.254: U2.2@22.45,14.625 22.375,14.7 21.349,14.7 20.573,15.476 20.573,18.224 24.2,21.851 24.2,24.176 24.349,24.325 R6.1
RESET: U2.1 U2.5 | length 7.8
  Top Layer w0.254: v1(21,13.4) 21.527,12.873 22.552,12.873 U2.5 ; v1(22,16.5) 22.013,16.487 22.013,15.473 22.111,15.375 U2.1
  Bottom Layer w0.254: v1(21,13.4) 21,13.434 20.5,13.934 20.5,15.4 21.007,15.907 21.407,15.907 v1(22,16.5)
Trigger: C4.1 LED1.2 P1.2 U1.1 U2.9 | length 43.3
  Top Layer w0.254: C4.1 9.9,20.175 9.9,14.8 10.995,13.705 U1.1 12.75,13.705 12.295,14.16 12.295,14.795 13.7,16.2 19.1,16.2 20.2,15.1 20.2,10.9 21.3,9.8 22.7,9.8 P1.2 ; C4.1@11.533,21.808 11.955,22.23 LED1.2 ; P1.2@25,7.75 27.975,10.725 U2.9@28.55,10.725
pads on no net: K1.2 U1.5 U1.6 U1.7 U2.3 U2.4 U2.6 U2.7 U2.10 U2.11 U2.12 U2.13 U2.14 U2.15

## Polygon pours and split planes (outlines as drawn)
GND on Layer 1 "GND_L02_P000" (solid, remove dead copper, pour order 0): 0,0 75,0 75,30 0,30
GND on Layer 2 "GND_L03_P002" (solid, remove dead copper, pour order 2): 0,0 75,0 75,30 0,30

## Text inside footprints (layer, text, board x,y; h text height)
J2: Top Overlay "A1" at 63.5,6.5 h1.3